# Altium PCB Analog.PcbDoc (part 1 of 2)
Units mil, origin at the board's own origin, x right, y up, seen from the top; angles counter-clockwise.
Board outline 2755 x 2460 mil, 4 copper layers (Top Layer, Power, Ground, Bottom Layer), stack 30.634 mil thick; 173 components, 144 nets, 556 pads, 140 vias.
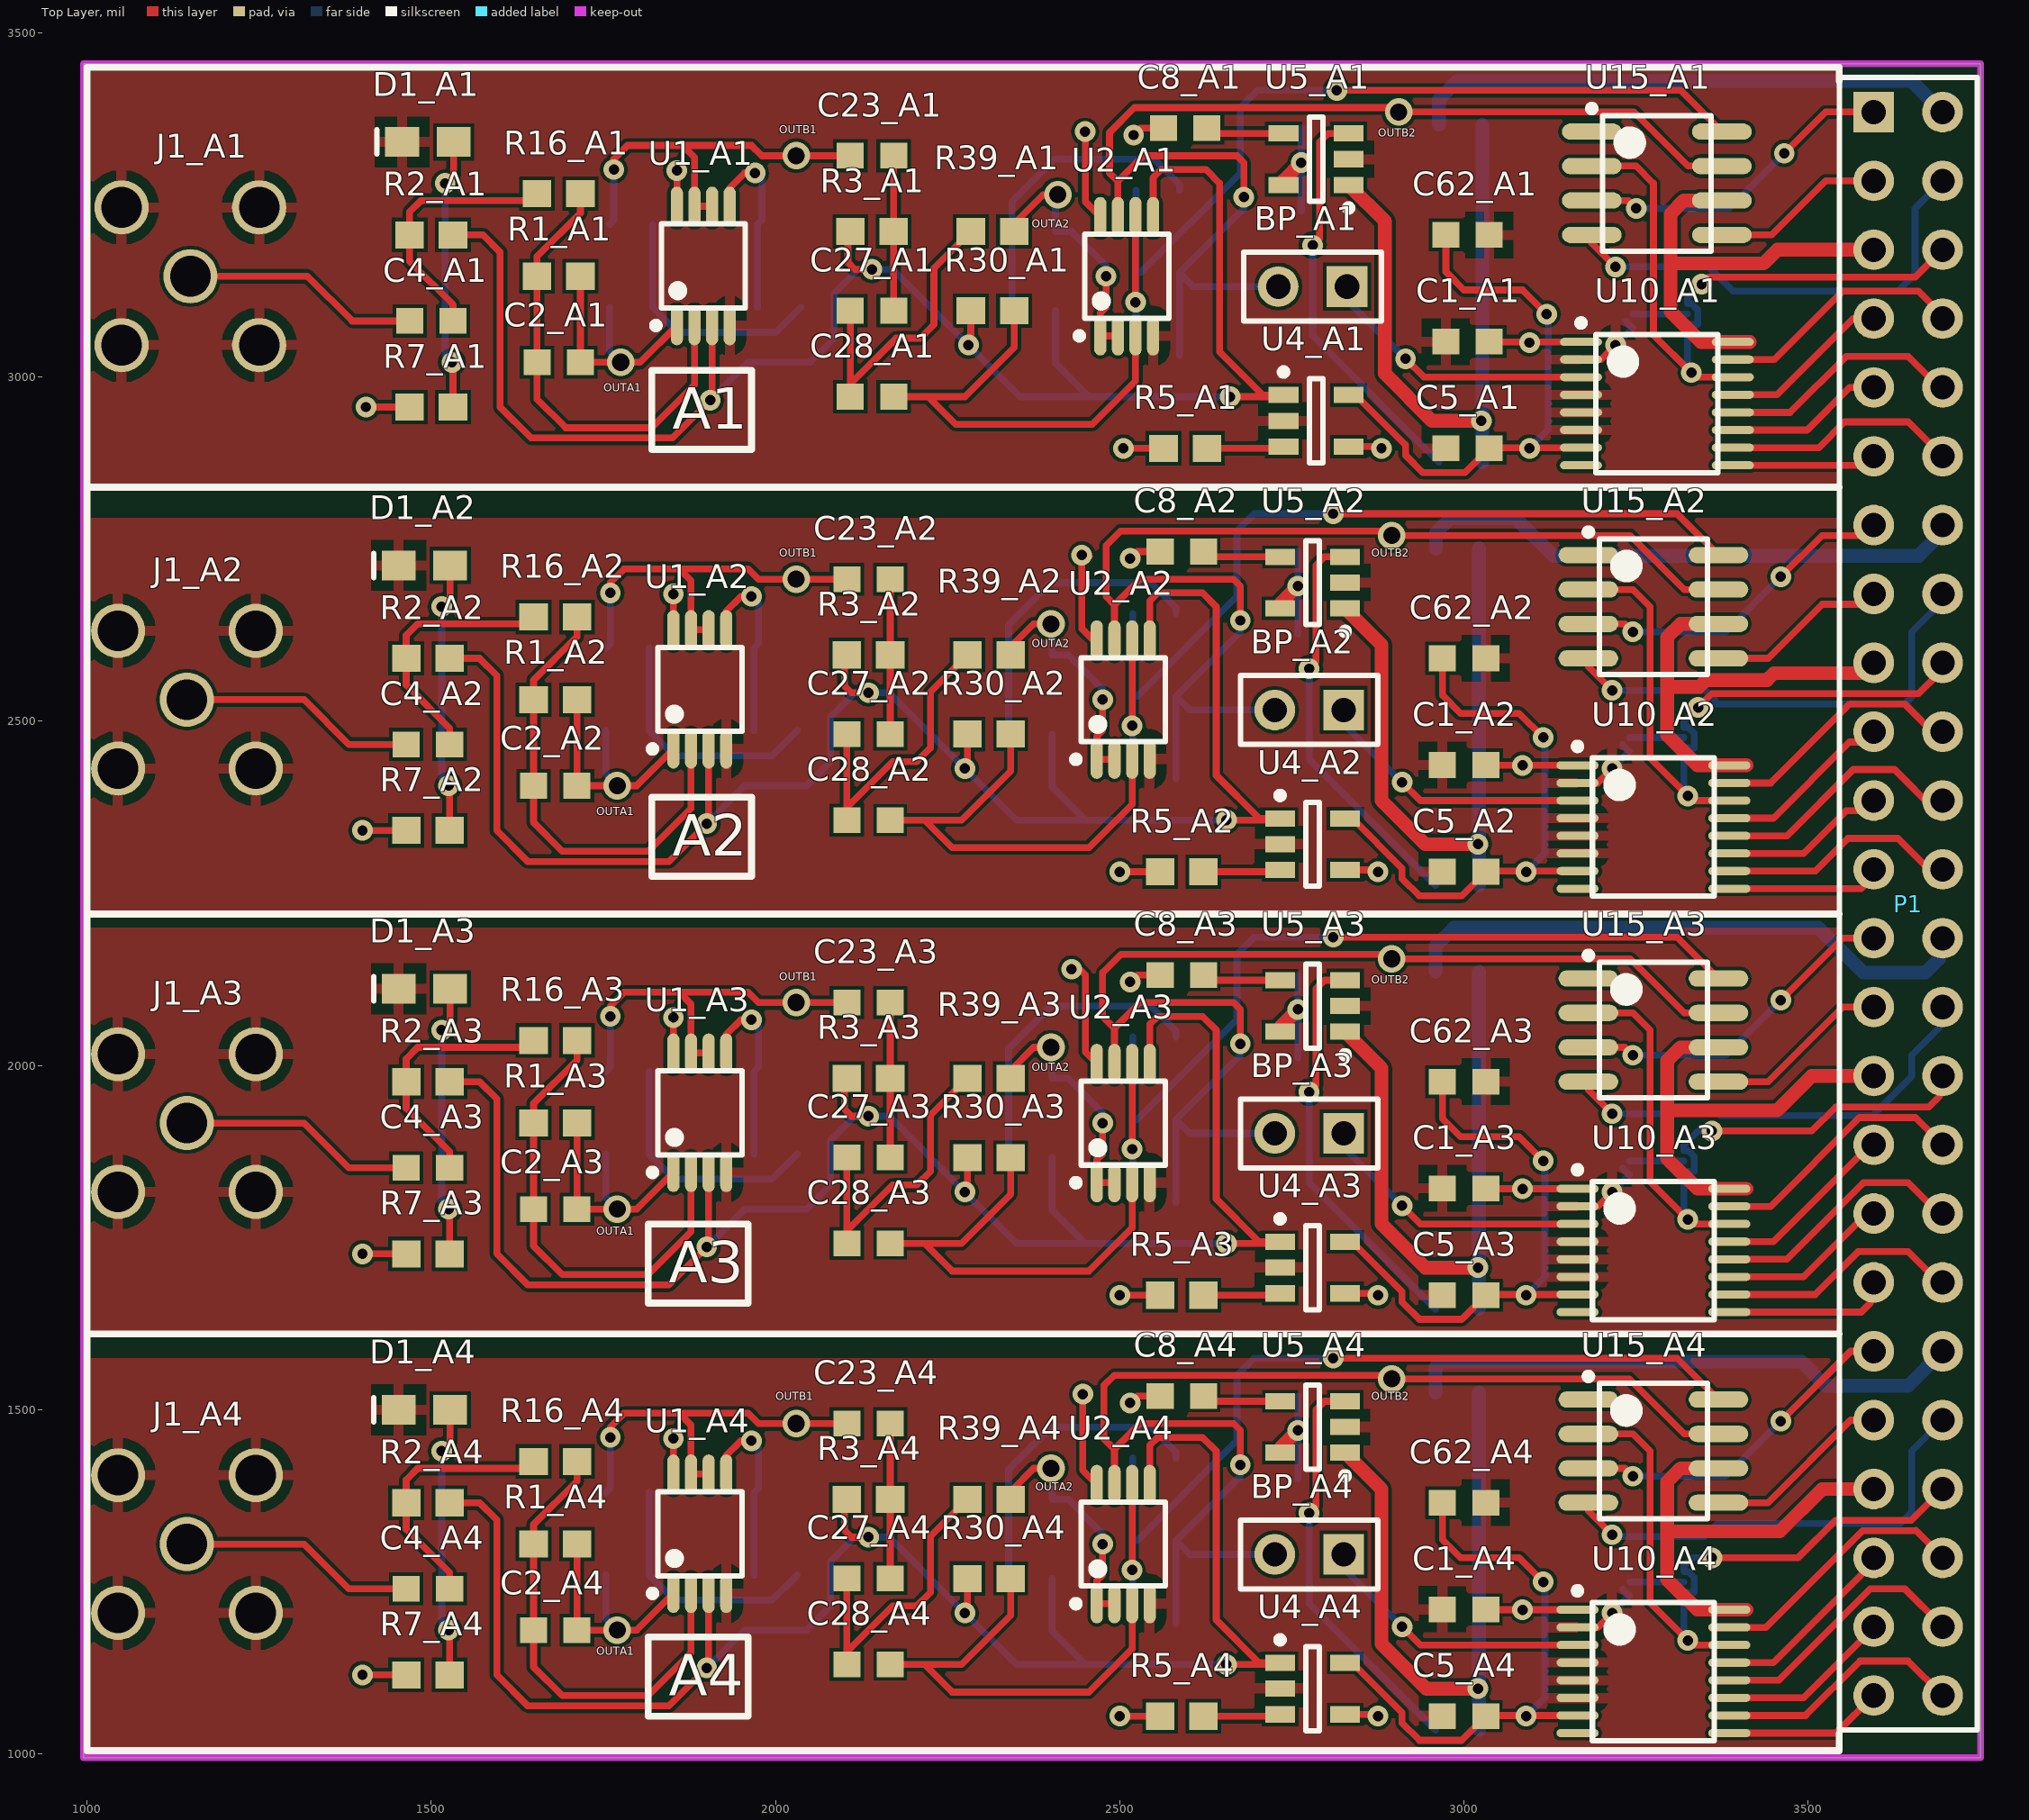
[diagram p0: Top Layer view]
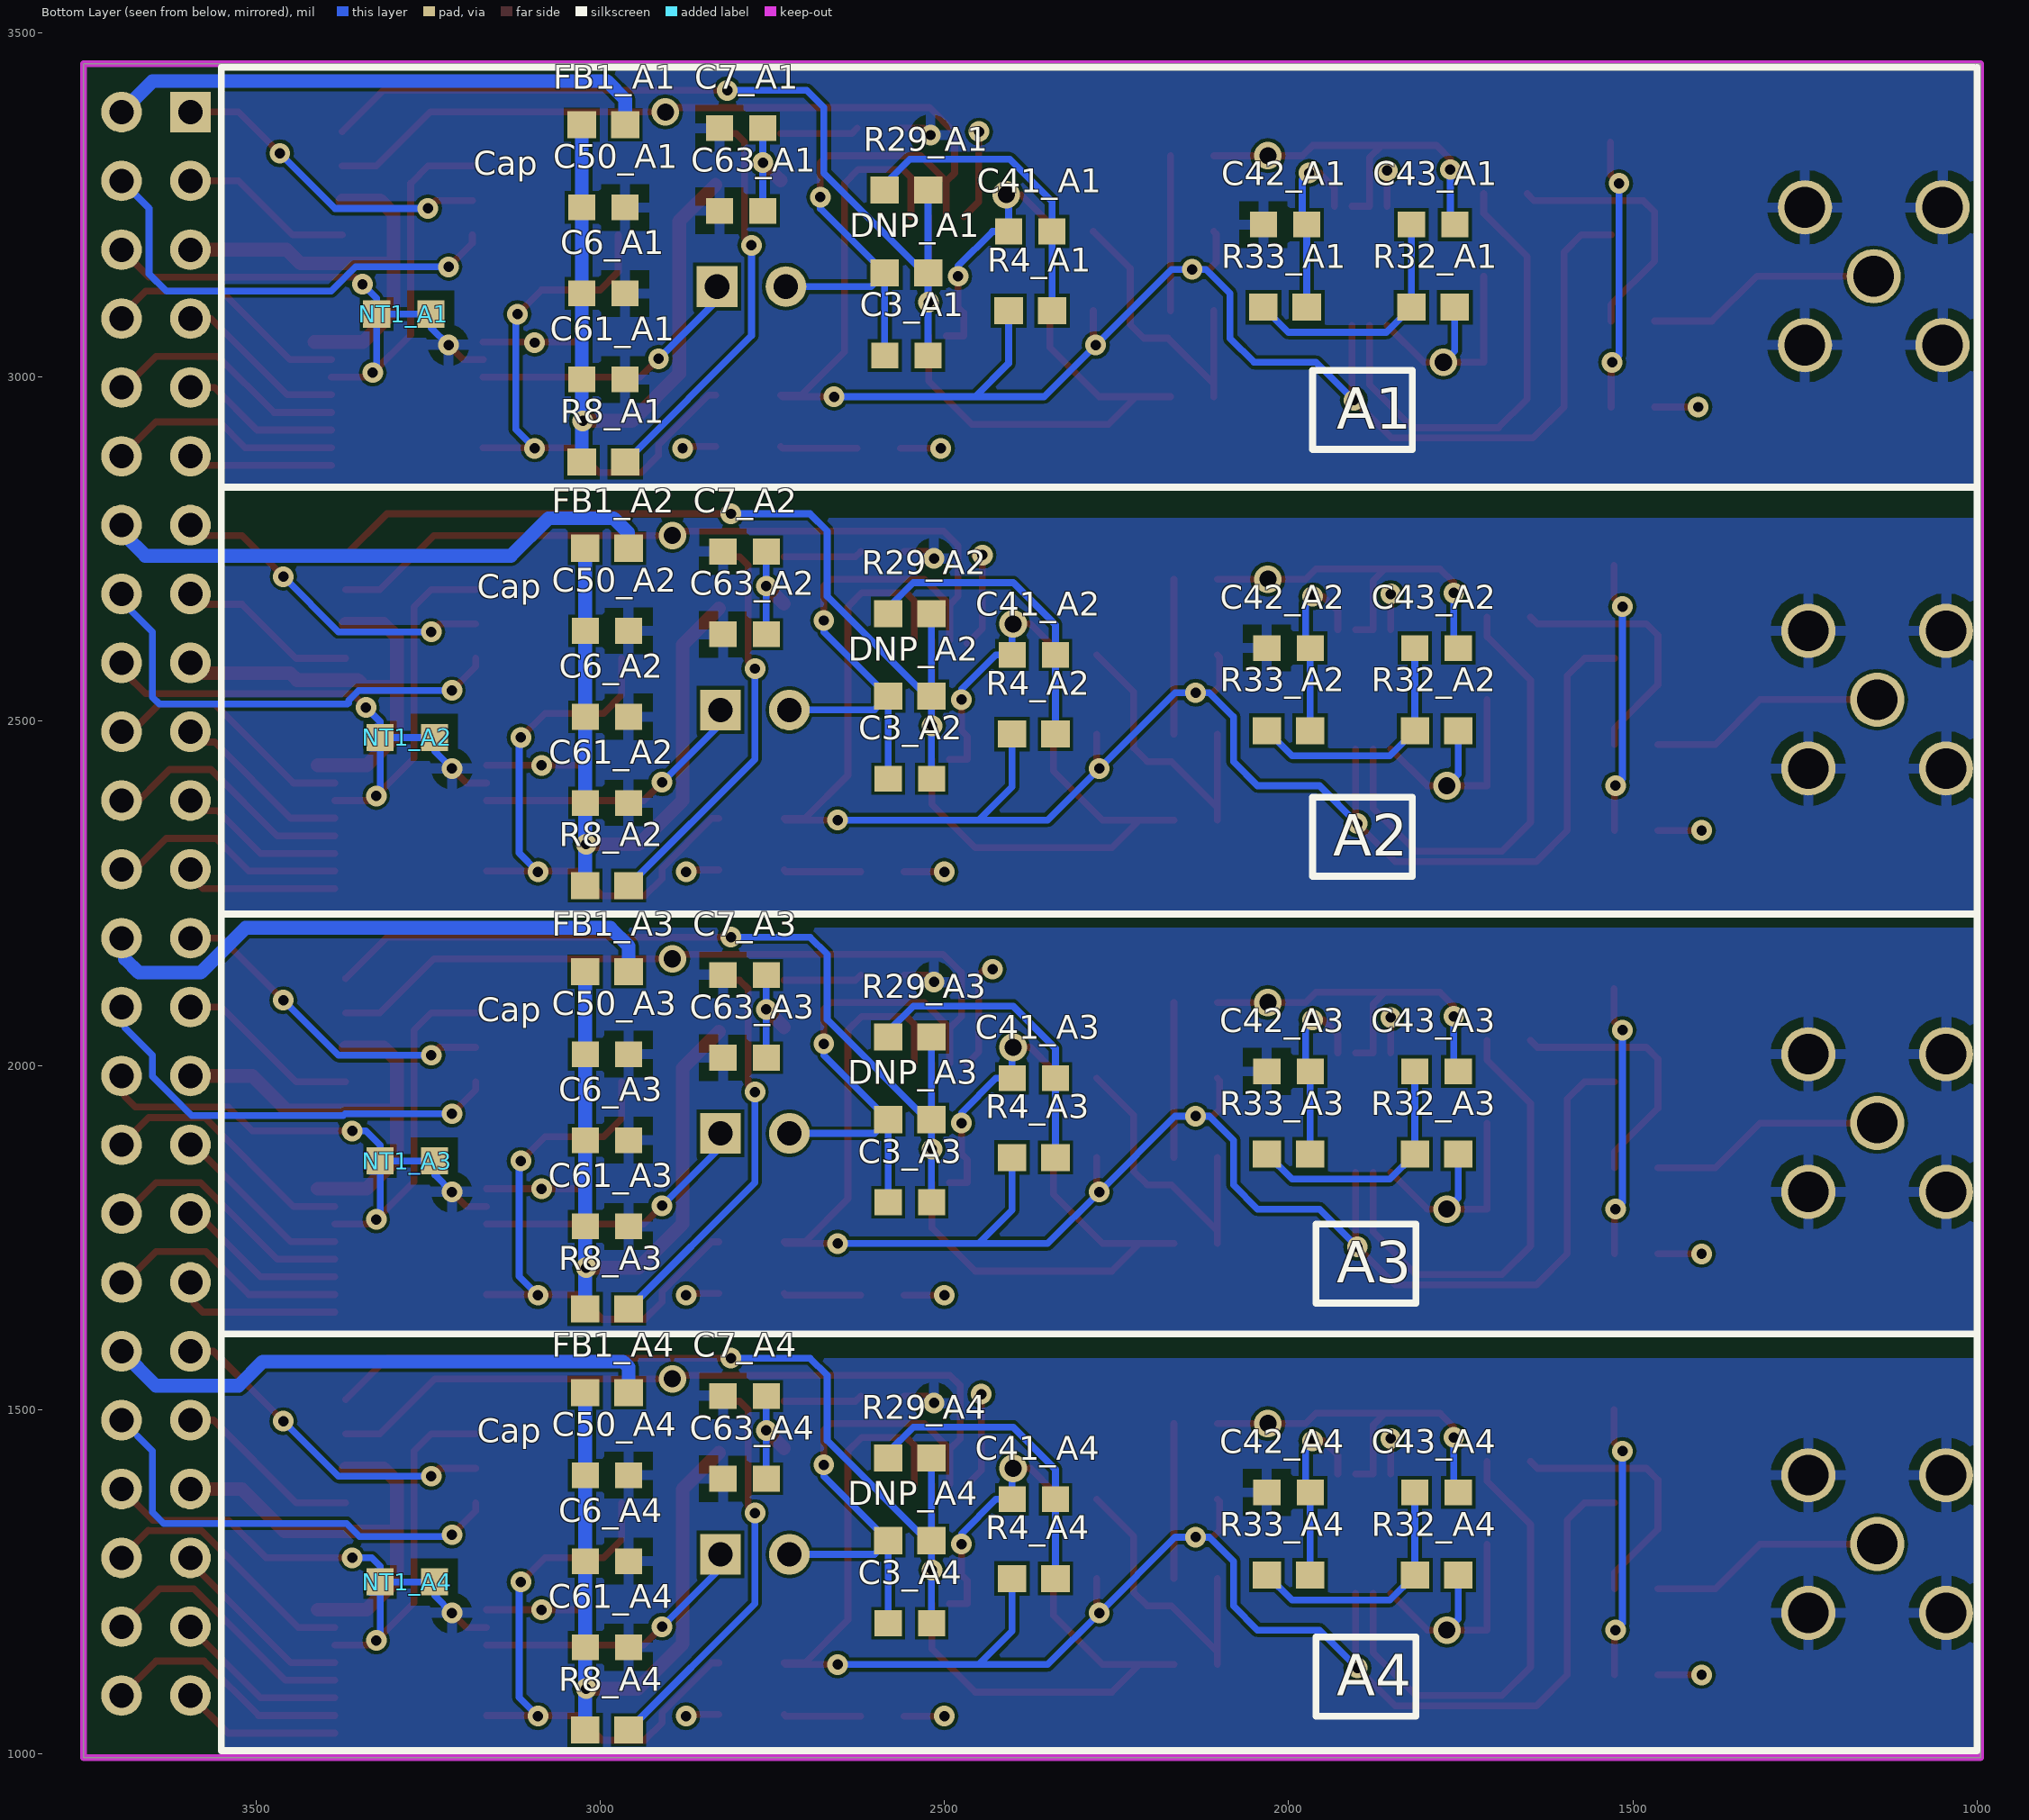
[diagram p1: Bottom Layer view, seen from below]
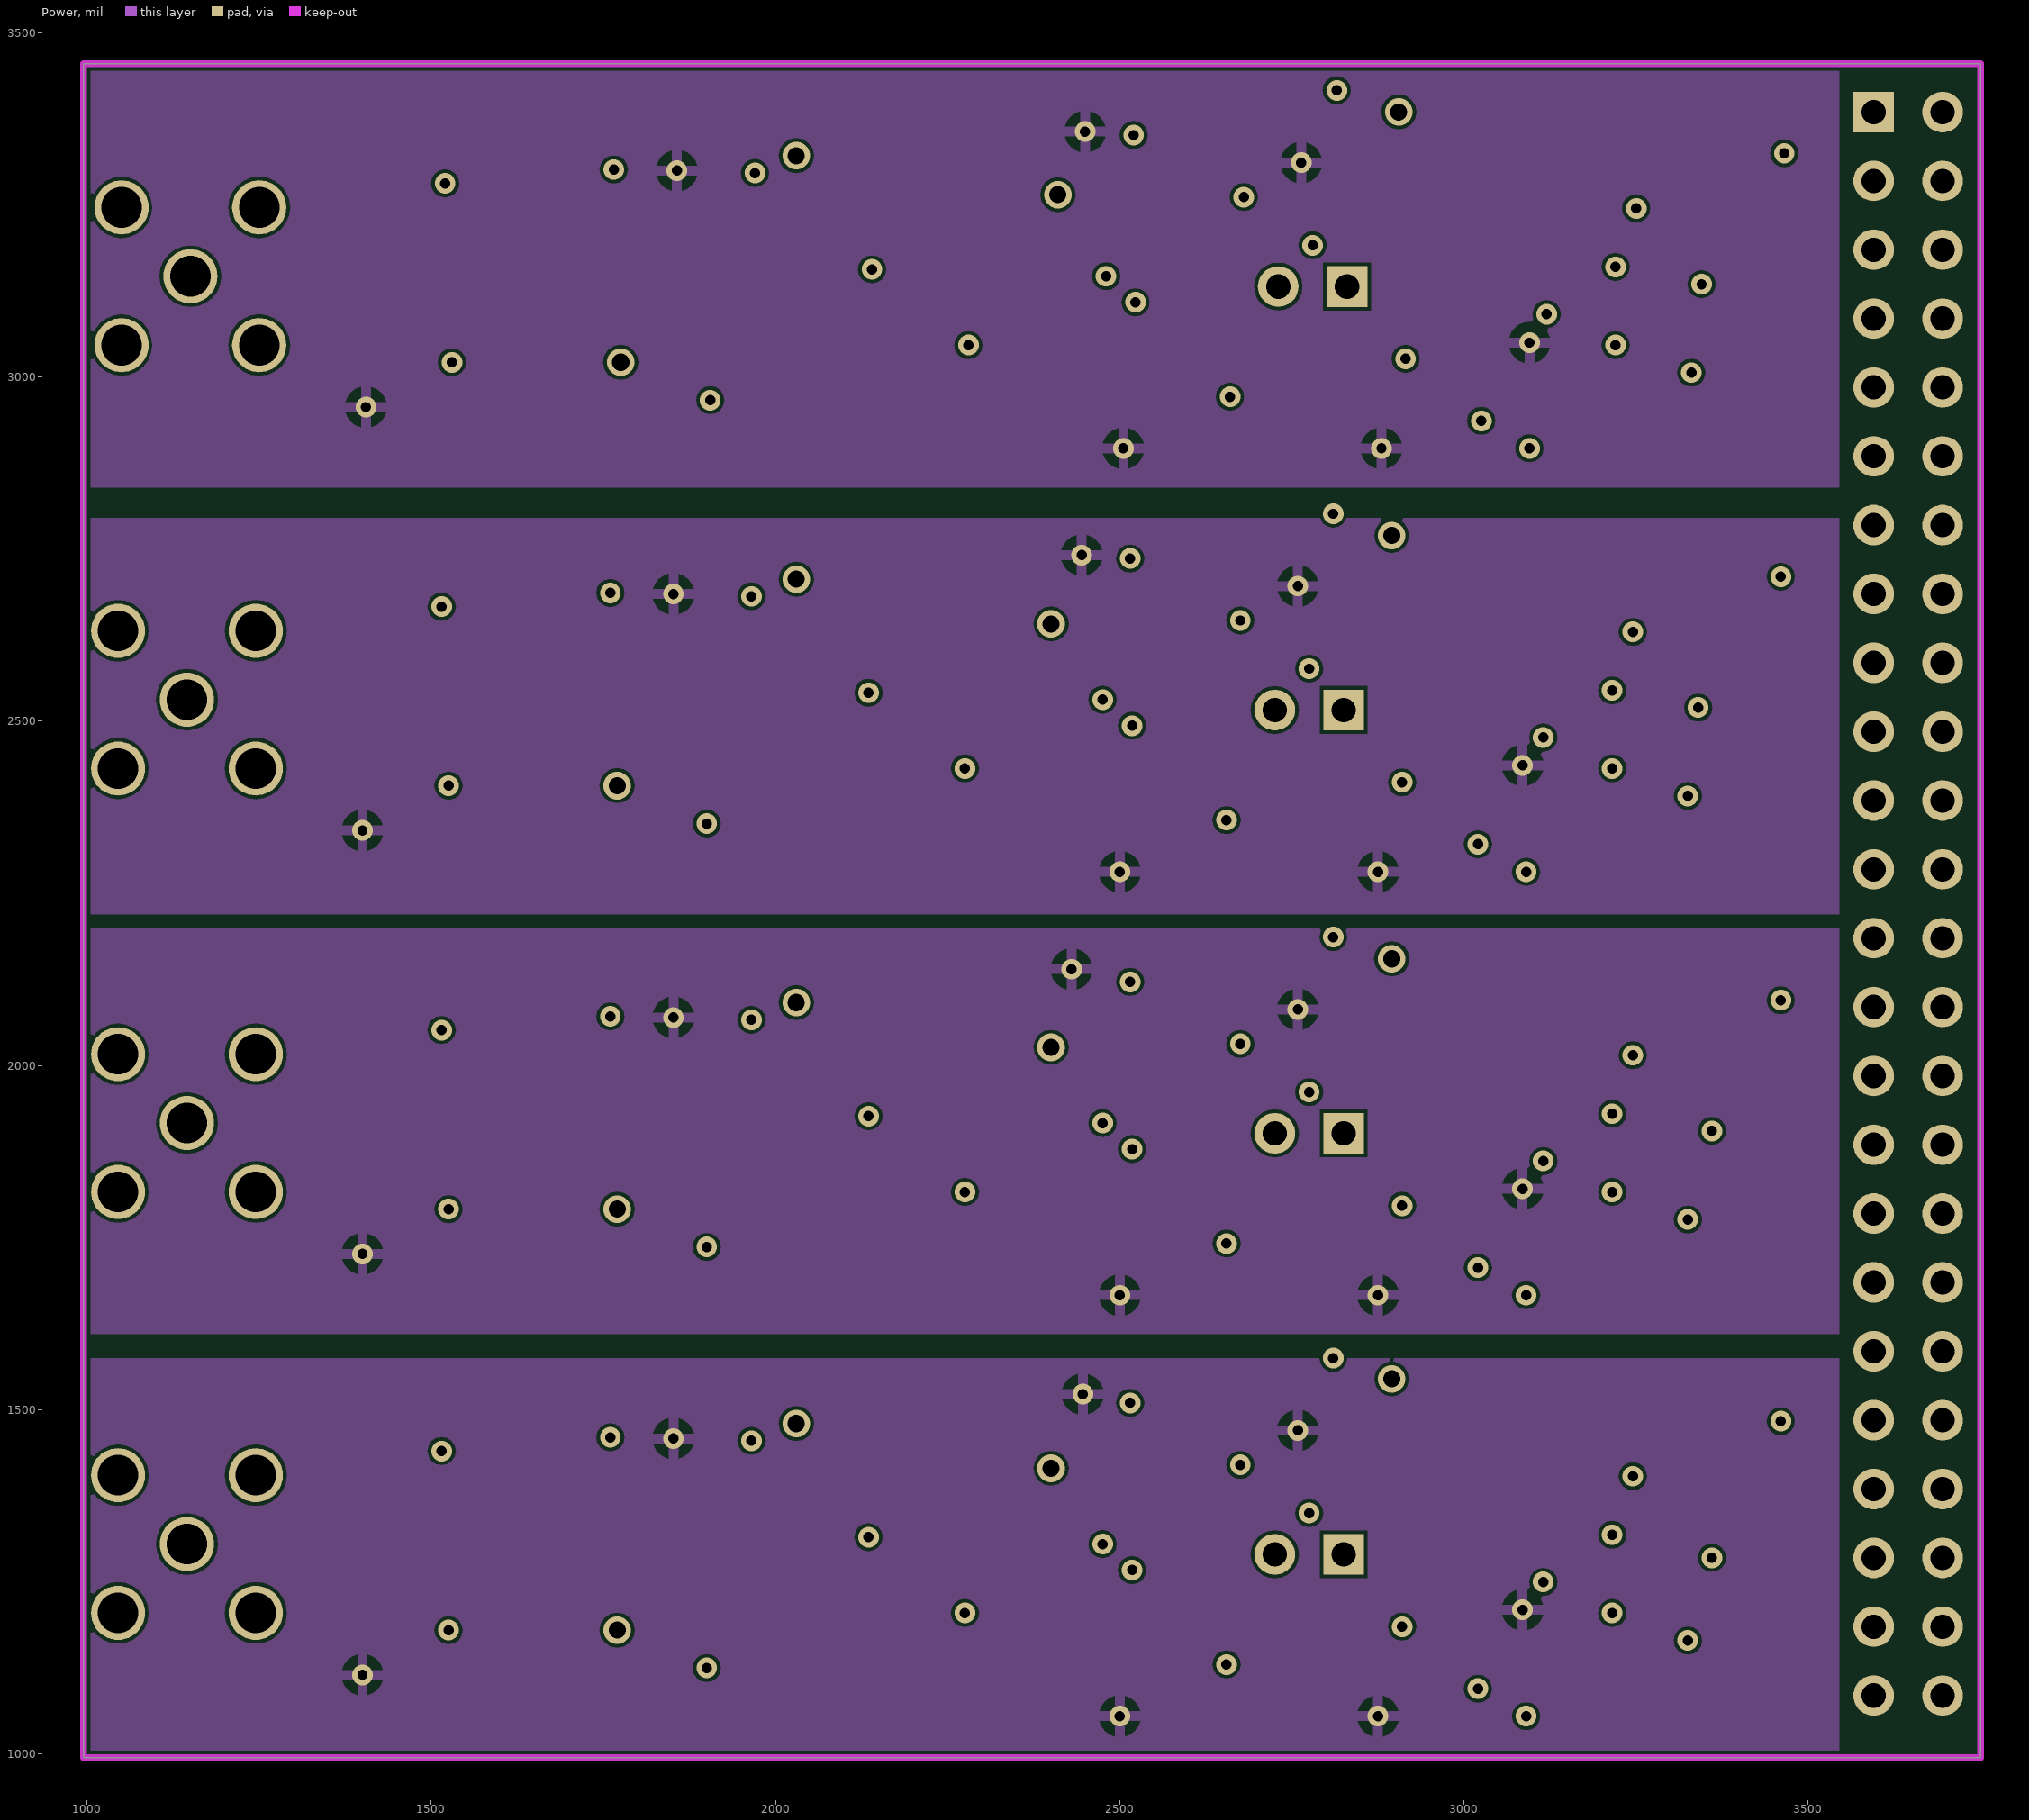
[diagram p2: Power]
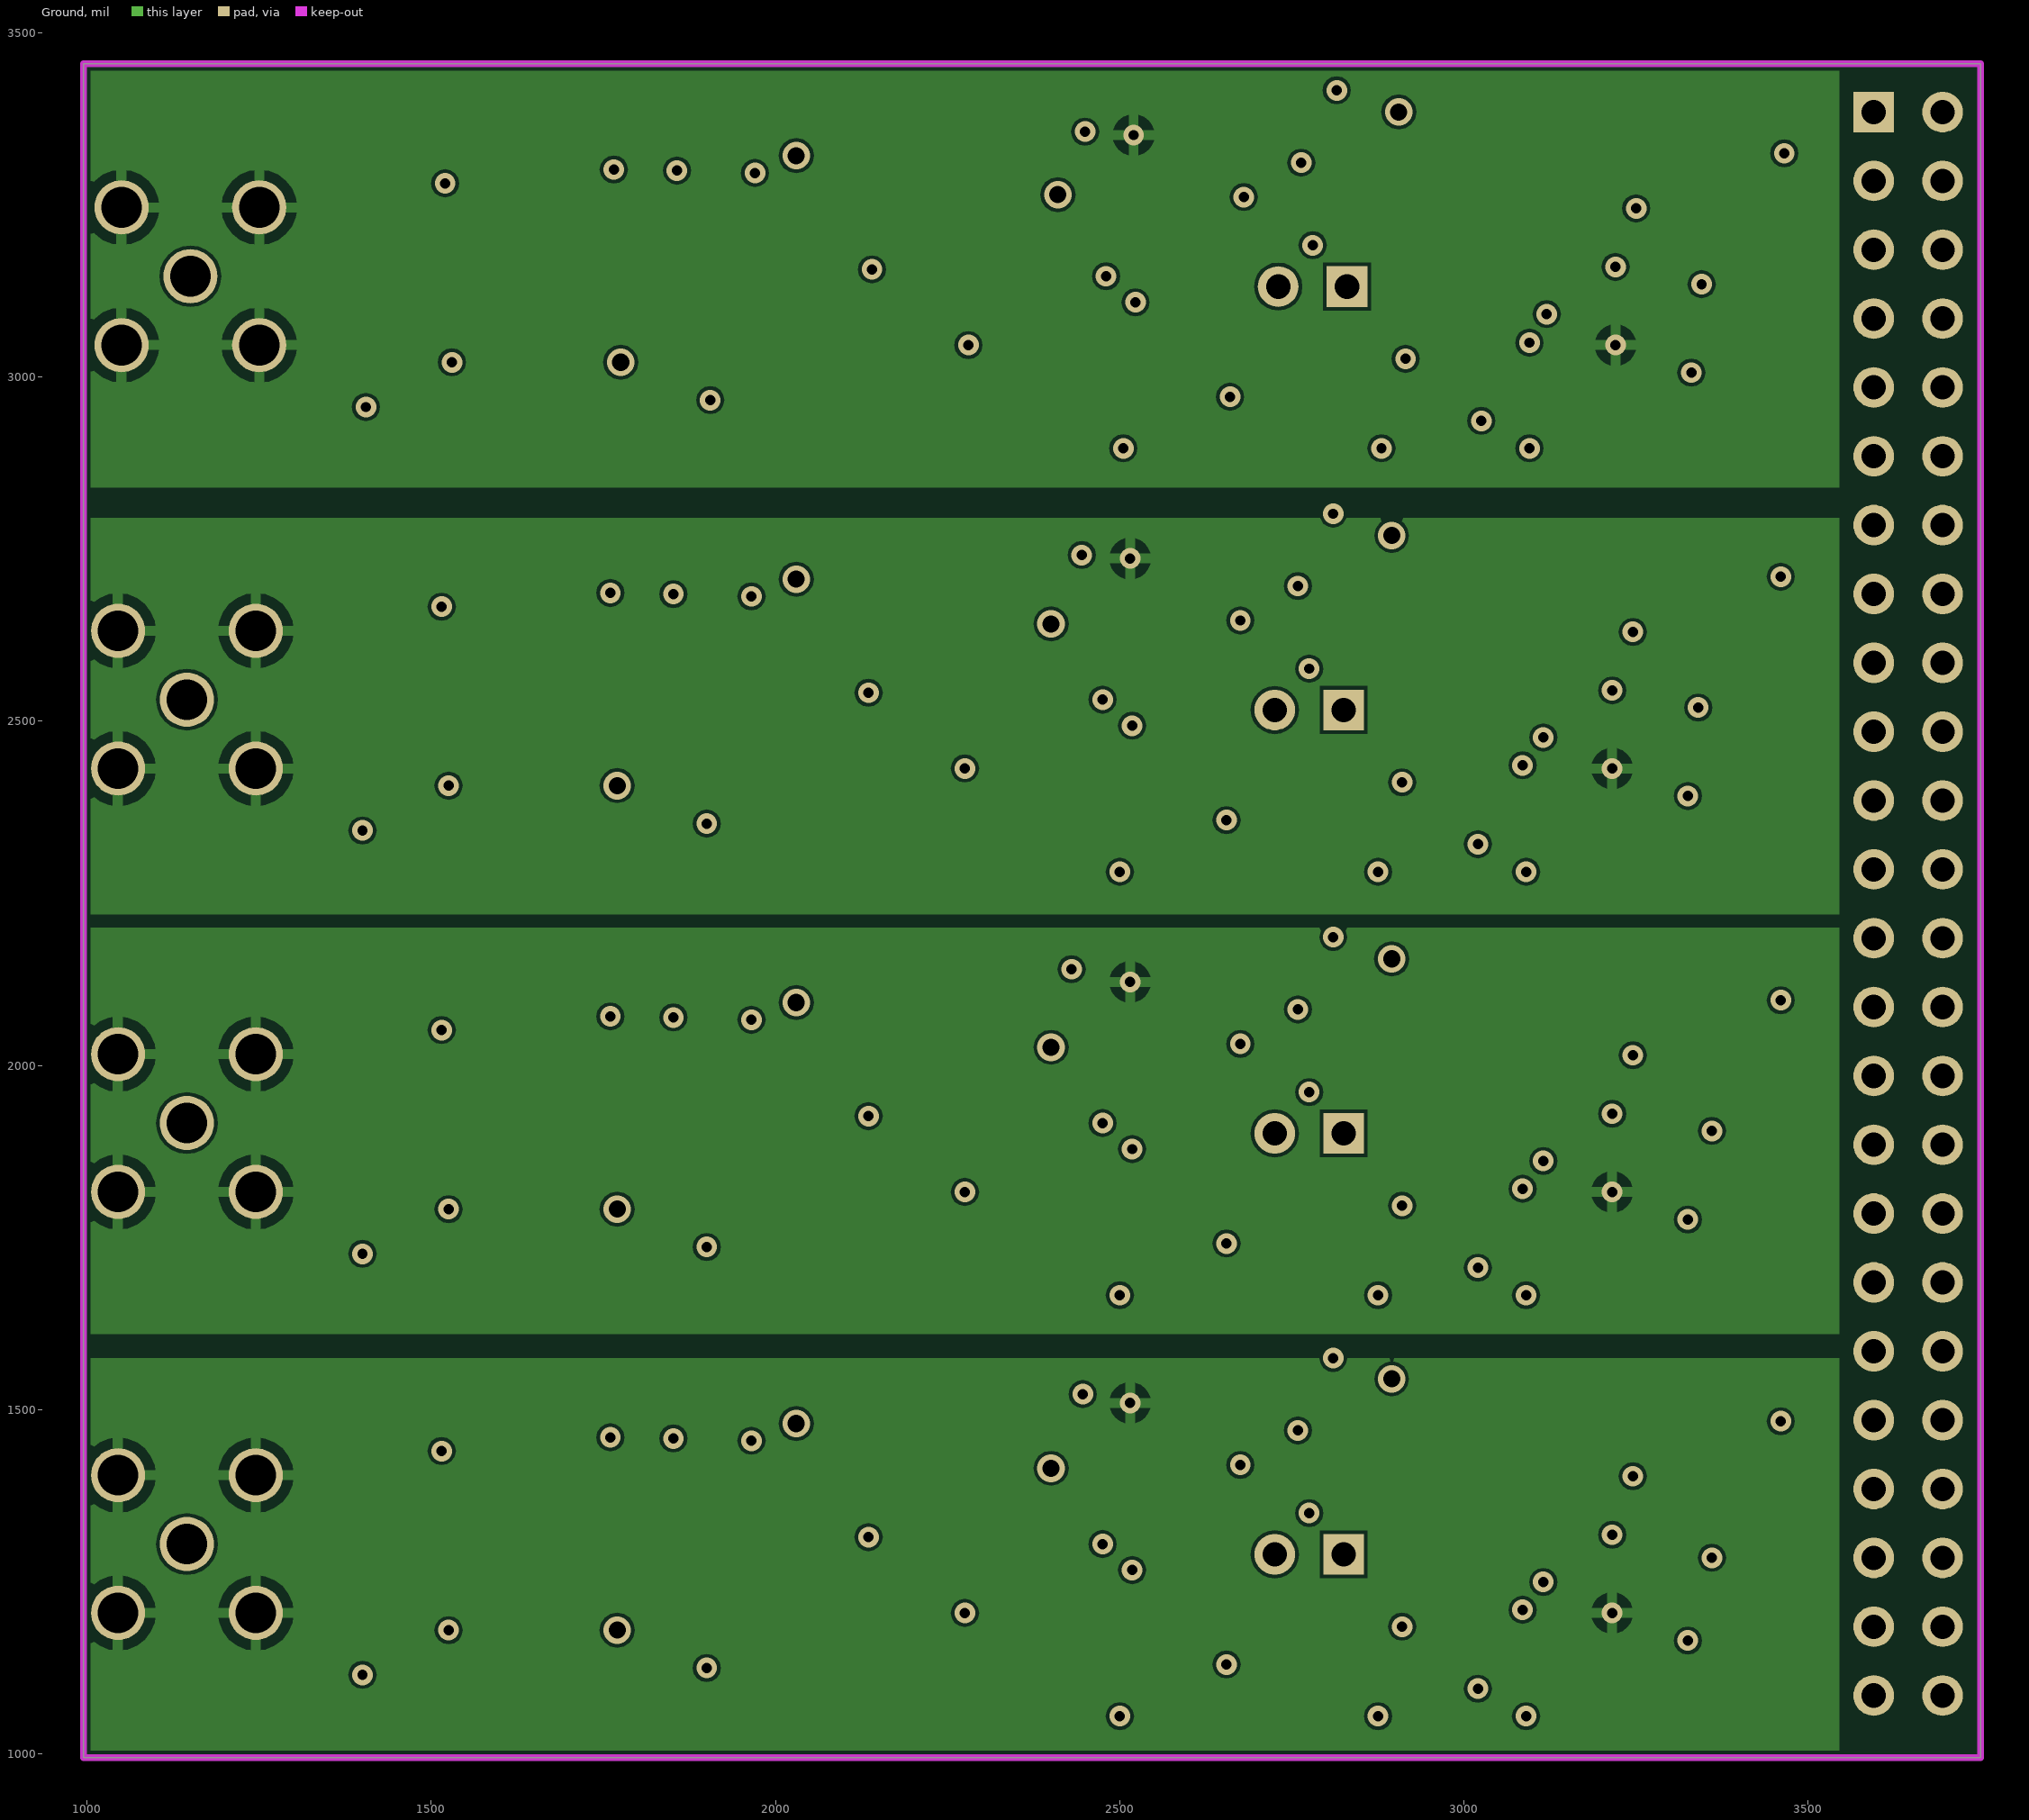
[diagram p3: Ground]

## Layer stack, top to bottom
Top Solder: solder mask 0.4, Solder Resist, Dk 3.5
Top Layer: signal copper 1.4
Dielectric 1: core 10, FR-4, Dk 4.2
Power: signal copper 1.417
Dielectric 3: prepreg 5, Dk 4.2
Ground: signal copper 1.417
Dielectric 2: core 10, Dk 4.2
Bottom Layer: signal copper 1.4
Bottom Solder: solder mask 0.4, Solder Resist, Dk 3.5

## Board outline
995,995 3750,995 3750,3455 995,3455

## Design rules (kind name [scope] priority, off if disabled: settings)
Clearance [All] p1: gap=5
PolygonConnect [All] p1: connectstyle=Relief reliefconductorwidth=15 reliefentries=4 polygonreliefangle="90 Angle" airgapwidth=15
RoomDefinition A4 [InComponentClass('A4')] p1: confinementstyle=ConfineIn formatcopy=TRUE lockcomponents=FALSE outline 1000,1000 3745,1000 3745,1610 1000,1610
RoomDefinition A3 [InComponentClass('A3')] p2: confinementstyle=ConfineIn formatcopy=TRUE lockcomponents=FALSE outline 1000,1611.5 3745,1611.5 3745,2221.5 1000,2221.5
RoomDefinition A2 [InComponentClass('A2')] p3: confinementstyle=ConfineIn formatcopy=TRUE lockcomponents=FALSE outline 1000,2226.5 3745,2226.5 3745,2836.5 1000,2836.5
RoomDefinition A1 [InComponentClass('A1')] p4: confinementstyle=ConfineIn formatcopy=TRUE lockcomponents=FALSE outline 1005,2841.5 3750,2841.5 3750,3451.5 1005,3451.5
RoutingVias [All] p1: holewidth=15 width=25 viastyle="Through Hole" minholewidth=15 minwidth=25 maxholewidth=25 maxwidth=40
SolderMaskExpansion [All] p1: expansion=4
Width [All] p1: maxlimit=20 minlimit=10 preferedwidth=10
30 further rules are at their usual default settings.

## Classes and differential pairs
net class DGND[1..4]: DGND1 DGND2 DGND3 DGND4
net class POT_CE[1..4]: POT_CE1 POT_CE2 POT_CE3 POT_CE4
net class EOC[1..4]: EOC1 EOC2 EOC3 EOC4
net class CONVST[1..4]: CONVST1 CONVST2 CONVST3 CONVST4
net class ADC_SCK[1..4]: ADC_SCK1 ADC_SCK2 ADC_SCK3 ADC_SCK4
component class Top_Level: P1
channel class Analog: A1 A2 A3 A4
net class APower: 4.2V_A1 4.2V_A2 4.2V_A3 4.2V_A4
net class AGround: AGND_A1 AGND_A2 AGND_A3 AGND_A4
component class A4: BP_A4 C1_A4 C2_A4 C3_A4 C4_A4 C5_A4 C6_A4 C7_A4 C8_A4 C23_A4 C27_A4 C28_A4 C41_A4 C42_A4 C43_A4 C50_A4 C61_A4 C62_A4 C63_A4 D1_A4 DNP_A4 FB1_A4 J1_A4 NT1_A4 R1_A4 R2_A4 R3_A4 R4_A4 R5_A4 R7_A4 R8_A4 R16_A4 R29_A4 R30_A4 R32_A4 R33_A4 R39_A4 U1_A4 U2_A4 U4_A4 U5_A4 U10_A4 U15_A4
component class A3: BP_A3 C1_A3 C2_A3 C3_A3 C4_A3 C5_A3 C6_A3 C7_A3 C8_A3 C23_A3 C27_A3 C28_A3 C41_A3 C42_A3 C43_A3 C50_A3 C61_A3 C62_A3 C63_A3 D1_A3 DNP_A3 FB1_A3 J1_A3 NT1_A3 R1_A3 R2_A3 R3_A3 R4_A3 R5_A3 R7_A3 R8_A3 R16_A3 R29_A3 R30_A3 R32_A3 R33_A3 R39_A3 U1_A3 U2_A3 U4_A3 U5_A3 U10_A3 U15_A3
component class A2: BP_A2 C1_A2 C2_A2 C3_A2 C4_A2 C5_A2 C6_A2 C7_A2 C8_A2 C23_A2 C27_A2 C28_A2 C41_A2 C42_A2 C43_A2 C50_A2 C61_A2 C62_A2 C63_A2 D1_A2 DNP_A2 FB1_A2 J1_A2 NT1_A2 R1_A2 R2_A2 R3_A2 R4_A2 R5_A2 R7_A2 R8_A2 R16_A2 R29_A2 R30_A2 R32_A2 R33_A2 R39_A2 U1_A2 U2_A2 U4_A2 U5_A2 U10_A2 U15_A2
component class A1: BP_A1 C1_A1 C2_A1 C3_A1 C4_A1 C5_A1 C6_A1 C7_A1 C8_A1 C23_A1 C27_A1 C28_A1 C41_A1 C42_A1 C43_A1 C50_A1 C61_A1 C62_A1 C63_A1 D1_A1 DNP_A1 FB1_A1 J1_A1 NT1_A1 R1_A1 R2_A1 R3_A1 R4_A1 R5_A1 R7_A1 R8_A1 R16_A1 R29_A1 R30_A1 R32_A1 R33_A1 R39_A1 U1_A1 U2_A1 U4_A1 U5_A1 U10_A1 U15_A1

## Components (designator, comment, footprint, x,y, rotation, side; value= is the part's Value field where it differs from the comment)
BP_A1 "Header 2" HDR1X2 2830,3131.5 r180 top (schematic designator BP)
BP_A2 "Header 2" HDR1X2 2825,2516.5 r180 top (schematic designator BP)
BP_A3 "Header 2" HDR1X2 2825,1901.5 r180 top (schematic designator BP)
BP_A4 "Header 2" HDR1X2 2825,1290 r180 top (schematic designator BP)
C1_A1 "Cap" CAPC0603 3005,3051.5 r0 top (schematic designator C1)
C1_A2 "Cap" CAPC0603 3000,2436.5 r0 top (schematic designator C1)
C1_A3 "Cap" CAPC0603 3000,1821.5 r0 top (schematic designator C1)
C1_A4 "Cap" CAPC0603 3000,1210 r0 top (schematic designator C1)
C2_A1 "Cap" CAPC0603 1685,3021.5 r0 top (schematic designator C2)
C2_A2 "Cap" CAPC0603 1680,2406.5 r0 top (schematic designator C2)
C2_A3 "Cap" CAPC0603 1680,1791.5 r0 top (schematic designator C2)
C2_A4 "Cap" CAPC0603 1680,1180 r0 top (schematic designator C2)
C3_A1 "Cap" CAPC0603 2555,3031.5 r0 bottom (schematic designator C3)
C3_A2 "Cap" CAPC0603 2550,2416.5 r0 bottom (schematic designator C3)
C3_A3 "Cap" CAPC0603 2550,1801.5 r0 bottom (schematic designator C3)
C3_A4 "Cap" CAPC0603 2550,1190 r0 bottom (schematic designator C3)
C4_A1 "Cap" CAPC0603 1500,3081.5 r0 top (schematic designator C4)
C4_A2 "Cap" CAPC0603 1495,2466.5 r0 top (schematic designator C4)
C4_A3 "Cap" CAPC0603 1495,1851.5 r0 top (schematic designator C4)
C4_A4 "Cap" CAPC0603 1495,1240 r0 top (schematic designator C4)
C5_A1 "Cap" CAPC0603 3005,2896.5 r0 top (schematic designator C5)
C5_A2 "Cap" CAPC0603 3000,2281.5 r0 top (schematic designator C5)
C5_A3 "Cap" CAPC0603 3000,1666.5 r0 top (schematic designator C5)
C5_A4 "Cap" CAPC0603 3000,1055 r0 top (schematic designator C5)
C6_A1 "Cap" CAPC0603 2995,3121.5 r0 bottom (schematic designator C6)
C6_A2 "Cap" CAPC0603 2990,2506.5 r0 bottom (schematic designator C6)
C6_A3 "Cap" CAPC0603 2990,1891.5 r0 bottom (schematic designator C6)
C6_A4 "Cap" CAPC0603 2990,1280 r0 bottom (schematic designator C6)
C7_A1 "Cap" CAPC0603 2795,3361.5 r180 bottom (schematic designator C7)
C7_A2 "Cap" CAPC0603 2790,2746.5 r180 bottom (schematic designator C7)
C7_A3 "Cap" CAPC0603 2790,2131.5 r180 bottom (schematic designator C7)
C7_A4 "Cap" CAPC0603 2790,1520 r180 bottom (schematic designator C7)
C8_A1 "Cap" CAPC0603 2595,3361.5 r0 top (schematic designator C8)
C8_A2 "Cap" CAPC0603 2590,2746.5 r0 top (schematic designator C8)
C8_A3 "Cap" CAPC0603 2590,2131.5 r0 top (schematic designator C8)
C8_A4 "Cap" CAPC0603 2590,1520 r0 top (schematic designator C8)
C23_A1 "Cap" CAPC0603 2140,3321.5 r0 top (schematic designator C23)
C23_A2 "Cap" CAPC0603 2135,2706.5 r0 top (schematic designator C23)
C23_A3 "Cap" CAPC0603 2135,2091.5 r0 top (schematic designator C23)
C23_A4 "Cap" CAPC0603 2135,1480 r0 top (schematic designator C23)
C27_A1 "Cap" CAPC0603 2140,3096.5 r180 top (schematic designator C27)
C27_A2 "Cap" CAPC0603 2135,2481.5 r180 top (schematic designator C27)
C27_A3 "Cap" CAPC0603 2135,1866.5 r180 top (schematic designator C27)
C27_A4 "Cap" CAPC0603 2135,1255 r180 top (schematic designator C27)
C28_A1 "Cap" CAPC0603 2140,2971.5 r0 top (schematic designator C28)
C28_A2 "Cap" CAPC0603 2135,2356.5 r0 top (schematic designator C28)
C28_A3 "Cap" CAPC0603 2135,1741.5 r0 top (schematic designator C28)
C28_A4 "Cap" CAPC0603 2135,1130 r0 top (schematic designator C28)
C41_A1 "Cap" CAPC0603 2375,3211.5 r180 bottom (schematic designator C41)
C41_A2 "Cap" CAPC0603 2370,2596.5 r180 bottom (schematic designator C41)
C41_A3 "Cap" CAPC0603 2370,1981.5 r180 bottom (schematic designator C41)
C41_A4 "Cap" CAPC0603 2370,1370 r180 bottom (schematic designator C41)
C42_A1 "Cap" CAPC0603 2005,3221.5 r180 bottom (schematic designator C42)
C42_A2 "Cap" CAPC0603 2000,2606.5 r180 bottom (schematic designator C42)
C42_A3 "Cap" CAPC0603 2000,1991.5 r180 bottom (schematic designator C42)
C42_A4 "Cap" CAPC0603 2000,1380 r180 bottom (schematic designator C42)
C43_A1 "Cap" CAPC0603 1790,3221.5 r0 bottom (schematic designator C43)
C43_A2 "Cap" CAPC0603 1785,2606.5 r0 bottom (schematic designator C43)
C43_A3 "Cap" CAPC0603 1785,1991.5 r0 bottom (schematic designator C43)
C43_A4 "Cap" CAPC0603 1785,1380 r0 bottom (schematic designator C43)
C50_A1 "Cap" CAPC0603 2995,3246.5 r180 bottom (schematic designator C50)
C50_A2 "Cap" CAPC0603 2990,2631.5 r180 bottom (schematic designator C50)
C50_A3 "Cap" CAPC0603 2990,2016.5 r180 bottom (schematic designator C50)
C50_A4 "Cap" CAPC0603 2990,1405 r180 bottom (schematic designator C50)
C61_A1 "Cap" CAPC0603 2995,2996.5 r180 bottom (schematic designator C61)
C61_A2 "Cap" CAPC0603 2990,2381.5 r180 bottom (schematic designator C61)
C61_A3 "Cap" CAPC0603 2990,1766.5 r180 bottom (schematic designator C61)
C61_A4 "Cap" CAPC0603 2990,1155 r180 bottom (schematic designator C61)
C62_A1 "Cap" CAPC0603 3005,3206.5 r0 top (schematic designator C62)
C62_A2 "Cap" CAPC0603 3000,2591.5 r0 top (schematic designator C62)
C62_A3 "Cap" CAPC0603 3000,1976.5 r0 top (schematic designator C62)
C62_A4 "Cap" CAPC0603 3000,1365 r0 top (schematic designator C62)
C63_A1 "Cap" CAPC0603 2795,3241.5 r0 bottom (schematic designator C63)
C63_A2 "Cap" CAPC0603 2790,2626.5 r0 bottom (schematic designator C63)
C63_A3 "Cap" CAPC0603 2790,2011.5 r0 bottom (schematic designator C63)
C63_A4 "Cap" CAPC0603 2790,1400 r0 bottom (schematic designator C63)
D1_A1 "LED-RED" LED0805-RED 1495,3341.5 r0 top (schematic designator D1)
D1_A2 "LED-RED" LED0805-RED 1490,2726.5 r0 top (schematic designator D1)
D1_A3 "LED-RED" LED0805-RED 1490,2111.5 r0 top (schematic designator D1)
D1_A4 "LED-RED" LED0805-RED 1490,1500 r0 top (schematic designator D1)
DNP_A1 "Res" RES0603 2555,3151.5 r0 bottom (schematic designator DNP)
DNP_A2 "Res" RES0603 2550,2536.5 r0 bottom (schematic designator DNP)
DNP_A3 "Res" RES0603 2550,1921.5 r0 bottom (schematic designator DNP)
DNP_A4 "Res" RES0603 2550,1310 r0 bottom (schematic designator DNP)
FB1_A1 "FBead" RES0603 2995,3366.5 r0 bottom (schematic designator FB1)
FB1_A2 "FBead" RES0603 2990,2751.5 r0 bottom (schematic designator FB1)
FB1_A3 "FBead" RES0603 2990,2136.5 r0 bottom (schematic designator FB1)
FB1_A4 "FBead" RES0603 2990,1525 r0 bottom (schematic designator FB1)
J1_A1 "MCX_FM" MCX_FEMALE 1150,3146.5 r0 top (schematic designator J1)
J1_A2 "MCX_FM" MCX_FEMALE 1145,2531.5 r0 top (schematic designator J1)
J1_A3 "MCX_FM" MCX_FEMALE 1145,1916.5 r0 top (schematic designator J1)
J1_A4 "MCX_FM" MCX_FEMALE 1145,1305 r0 top (schematic designator J1)
NT1_A1 "NetTie" NT_5mil 3285,3091.5 r0 bottom net-tie (schematic designator NT1)
NT1_A2 "NetTie" NT_5mil 3280,2476.5 r0 bottom net-tie (schematic designator NT1)
NT1_A3 "NetTie" NT_5mil 3280,1861.5 r0 bottom net-tie (schematic designator NT1)
NT1_A4 "NetTie" NT_5mil 3280,1250 r0 bottom net-tie (schematic designator NT1)
P1 "Header 24X2" HDR2X24 3595,3385 r270 top
R1_A1 "Res" RES0603 1685,3146.5 r0 top (schematic designator R1)
R1_A2 "Res" RES0603 1680,2531.5 r0 top (schematic designator R1)
R1_A3 "Res" RES0603 1680,1916.5 r0 top (schematic designator R1)
R1_A4 "Res" RES0603 1680,1305 r0 top (schematic designator R1)
R2_A1 "Res" RES0603 1500,3206.5 r180 top (schematic designator R2)
R2_A2 "Res" RES0603 1495,2591.5 r180 top (schematic designator R2)
R2_A3 "Res" RES0603 1495,1976.5 r180 top (schematic designator R2)
R2_A4 "Res" RES0603 1495,1365 r180 top (schematic designator R2)
R3_A1 "Res" RES0603 2140,3211.5 r0 top (schematic designator R3)
R3_A2 "Res" RES0603 2135,2596.5 r0 top (schematic designator R3)
R3_A3 "Res" RES0603 2135,1981.5 r0 top (schematic designator R3)
R3_A4 "Res" RES0603 2135,1370 r0 top (schematic designator R3)
R4_A1 "Res" RES0603 2375,3096.5 r180 bottom (schematic designator R4)
R4_A2 "Res" RES0603 2370,2481.5 r180 bottom (schematic designator R4)
R4_A3 "Res" RES0603 2370,1866.5 r180 bottom (schematic designator R4)
R4_A4 "Res" RES0603 2370,1255 r180 bottom (schematic designator R4)
R5_A1 "Res" RES0603 2595,2896.5 r180 top (schematic designator R5)
R5_A2 "Res" RES0603 2590,2281.5 r180 top (schematic designator R5)
R5_A3 "Res" RES0603 2590,1666.5 r180 top (schematic designator R5)
R5_A4 "Res" RES0603 2590,1055 r180 top (schematic designator R5)
R7_A1 "Res" RES0603 1500,2956.5 r0 top (schematic designator R7)
R7_A2 "Res" RES0603 1495,2341.5 r0 top (schematic designator R7)
R7_A3 "Res" RES0603 1495,1726.5 r0 top (schematic designator R7)
R7_A4 "Res" RES0603 1495,1115 r0 top (schematic designator R7)
R8_A1 "Res" RES0603 2995,2876.5 r0 bottom (schematic designator R8)
R8_A2 "Res" RES0603 2990,2261.5 r0 bottom (schematic designator R8)
R8_A3 "Res" RES0603 2990,1646.5 r0 bottom (schematic designator R8)
R8_A4 "Res" RES0603 2990,1035 r0 bottom (schematic designator R8)
R16_A1 "Res" RES0603 1685,3266.5 r0 top (schematic designator R16)
R16_A2 "Res" RES0603 1680,2651.5 r0 top (schematic designator R16)
R16_A3 "Res" RES0603 1680,2036.5 r0 top (schematic designator R16)
R16_A4 "Res" RES0603 1680,1425 r0 top (schematic designator R16)
R29_A1 "Res" RES0603 2555,3271.5 r180 bottom (schematic designator R29)
R29_A2 "Res" RES0603 2550,2656.5 r180 bottom (schematic designator R29)
R29_A3 "Res" RES0603 2550,2041.5 r180 bottom (schematic designator R29)
R29_A4 "Res" RES0603 2550,1430 r180 bottom (schematic designator R29)
R30_A1 "Res" RES0603 2315,3096.5 r0 top (schematic designator R30)
R30_A2 "Res" RES0603 2310,2481.5 r0 top (schematic designator R30)
R30_A3 "Res" RES0603 2310,1866.5 r0 top (schematic designator R30)
R30_A4 "Res" RES0603 2310,1255 r0 top (schematic designator R30)
R32_A1 "Res" RES0603 1790,3101.5 r0 bottom (schematic designator R32)
R32_A2 "Res" RES0603 1785,2486.5 r0 bottom (schematic designator R32)
R32_A3 "Res" RES0603 1785,1871.5 r0 bottom (schematic designator R32)
R32_A4 "Res" RES0603 1785,1260 r0 bottom (schematic designator R32)
R33_A1 "Res" RES0603 2005,3101.5 r180 bottom (schematic designator R33)
R33_A2 "Res" RES0603 2000,2486.5 r180 bottom (schematic designator R33)
R33_A3 "Res" RES0603 2000,1871.5 r180 bottom (schematic designator R33)
R33_A4 "Res" RES0603 2000,1260 r180 bottom (schematic designator R33)
R39_A1 "Res" RES0603 2315,3211.5 r0 top (schematic designator R39)
R39_A2 "Res" RES0603 2310,2596.5 r0 top (schematic designator R39)
R39_A3 "Res" RES0603 2310,1981.5 r0 top (schematic designator R39)
R39_A4 "Res" RES0603 2310,1370 r0 top (schematic designator R39)
U1_A1 "LMV797" TSSOP-8N 1895,3161.5 r90 top (schematic designator U1)
U1_A2 "LMV797" TSSOP-8N 1890,2546.5 r90 top (schematic designator U1)
U1_A3 "LMV797" TSSOP-8N 1890,1931.5 r90 top (schematic designator U1)
U1_A4 "LMV797" TSSOP-8N 1890,1320 r90 top (schematic designator U1)
U2_A1 "LMV797" TSSOP-8N 2510,3146.5 r90 top (schematic designator U2)
U2_A2 "LMV797" TSSOP-8N 2505,2531.5 r90 top (schematic designator U2)
U2_A3 "LMV797" TSSOP-8N 2505,1916.5 r90 top (schematic designator U2)
U2_A4 "LMV797" TSSOP-8N 2505,1305 r90 top (schematic designator U2)
U4_A1 "REF2041" SOT23-5 2785,2936.5 r0 top (schematic designator U4)
U4_A2 "REF2041" SOT23-5 2780,2321.5 r0 top (schematic designator U4)
U4_A3 "REF2041" SOT23-5 2780,1706.5 r0 top (schematic designator U4)
U4_A4 "REF2041" SOT23-5 2780,1095 r0 top (schematic designator U4)
U5_A1 "LDO 4.2V" sot23-5 2785,3316.5 r180 top (schematic designator U5)
U5_A2 "LDO 4.2V" sot23-5 2780,2701.5 r180 top (schematic designator U5)
U5_A3 "LDO 4.2V" sot23-5 2780,2086.5 r180 top (schematic designator U5)
U5_A4 "LDO 4.2V" sot23-5 2780,1475 r180 top (schematic designator U5)
U10_A1 "ADC 16bit 500k" TSSOP-16pin 3280,2961.5 r0 top (schematic designator U10)
U10_A2 "ADC 16bit 500k" TSSOP-16pin 3275,2346.5 r0 top (schematic designator U10)
U10_A3 "ADC 16bit 500k" TSSOP-16pin 3275,1731.5 r0 top (schematic designator U10)
U10_A4 "ADC 16bit 500k" TSSOP-16pin 3275,1120 r0 top (schematic designator U10)
U15_A1 "AD8400" SOIC-8PIN 3280,3281.5 r0 top (schematic designator U15)
U15_A2 "AD8400" SOIC-8PIN 3275,2666.5 r0 top (schematic designator U15)
U15_A3 "AD8400" SOIC-8PIN 3275,2051.5 r0 top (schematic designator U15)
U15_A4 "AD8400" SOIC-8PIN 3275,1440 r0 top (schematic designator U15)

## Footprints (in the part's own frame and the unit in brackets; to place one, negate y for a bottom-side part, rotate by r counter-clockwise, add the part's x,y. Pads: shape width x height; smd on the part's side, far side on the other; paste and mask are expansions set on the pad)
CAPC0603 [mm] "Chip Capacitor, 2-Leads, Body 1.60x0.80mm, IPC Medium Density"
  rect 1x0.95 smd: 1(-0.8,0) 2(0.8,0)
  body extent -0.88,-0.48 0.87,0.48, height 0.8
HDR1X2 [mm] "Connector; Header; 2 Position"
  rect 1.5x1.5 hole 0.9: 1(0,0)
  round 1.5 hole 0.9: 2(2.54,0)
  silkscreen extent -1.27,-1.27 3.81,1.27
HDR2X24 [mm] "Connector; Header; 24x2 Position"
  rect 1.5x1.5 hole 0.9: 1(0,0)
  round 1.5 hole 0.9: 2(0,2.54) 3(2.54,0) 4(2.54,2.54) 5(5.08,0) 6(5.08,2.54) 7(7.62,0) 8(7.62,2.54) 9(10.16,0) 10(10.16,2.54) 11(12.7,0) 12(12.7,2.54) 13(15.24,0) 14(15.24,2.54) 15(17.78,0) 16(17.78,2.54) 17(20.32,0) 18(20.32,2.54) 19(22.86,0) 20(22.86,2.54) 21(25.4,0) 22(25.4,2.54) 23(27.94,0) 24(27.94,2.54) 25(30.48,0) 26(30.48,2.54) 27(33.02,0) 28(33.02,2.54) 29(35.56,0) 30(35.56,2.54) 31(38.1,0) 32(38.1,2.54) 33(40.64,0) 34(40.64,2.54) 35(43.18,0) 36(43.18,2.54) 37(45.72,0) 38(45.72,2.54) 39(48.26,0) 40(48.26,2.54) 41(50.8,0) 42(50.8,2.54) 43(53.34,0) 44(53.34,2.54) 45(55.88,0) 46(55.88,2.54) 47(58.42,0) 48(58.42,2.54)
  silkscreen extent -1.27,-1.27 59.69,3.81
LED0805-RED [mm] "Molded Diode, 2-Leads, Body 2.0x1.3mm, IPC Medium Density"
  rect 1.25x1.1 smd: 1(-0.95,0) 2(0.95,0)
  silkscreen extent -1.87,-0.45 -1.87,0.45, body extent -1.01,-0.62 1.01,0.63, height 1.1
MCX_FEMALE [mm] "MCX_female CONN JACK RCPT R/A"
  round 2 hole 1.5: 1(0,0) 2(-2.54,-2.54) 2(-2.54,2.54) 2(2.54,-2.54) 2(2.54,2.54)
  body extent -2.95,-3.07 6.55,2.93, height 5.9
NT_5mil [mm] "Thin Net Tie"
  rect 1x1 smd paste+0 mask+0: 1(-1,0) 2(1,0)
  Top Layer lines w0.254: -1,0 1,0
RES0603 [mm] "Chip Resistor, 2-Leads, Body 1.60x0.80mm, IPC Medium Density"
  rect 1.05x1 smd: 1(-0.8,0) 2(0.8,0)
  body extent -0.88,-0.48 0.87,0.47, height 0.8
SOIC-8PIN [mm] "For 296-1345-1-ND"
  oval 2.2x0.6 smd: 1(-2.4,1.905) 2(-2.4,0.635) 3(-2.4,-0.635) 4(-2.4,-1.905) 5(2.4,-1.905) 6(2.4,-0.635) 7(2.4,0.635) 8(2.4,1.905)
  silkscreen extent -2.52,-2.5 2,2.88, body extent -2,-2.5 2,2.5, height 1.75
SOT23-5 [mm] "Used for LP2992"
  rect 1.1x0.6 smd: 1(-1.2,0.95) 2(-1.2,0) 3(-1.2,-0.95) 4(1.2,-0.95) 5(1.2,0.95)
  silkscreen extent -1.32,-1.55 0.25,1.92, body extent -0.87,-1.52 0.87,1.53, height 0.25
sot23-5 [mm] "Used for LP2992"
  rect 1.1x0.6 smd: 1(-1.2,0.95) 2(-1.2,0) 3(-1.2,-0.95) 4(1.2,-0.95) 5(1.2,0.95)
  silkscreen extent -1.33,-1.55 0.25,1.92, body extent -0.87,-1.52 0.87,1.53, height 0.25
TSSOP-8N [mm]
  oval 1.45x0.45 smd: 1(-2.2,0.975) 2(-2.2,0.325) 3(-2.2,-0.325) 4(-2.2,-0.975) 5(2.2,-0.975) 6(2.2,-0.325) 7(2.2,0.325) 8(2.2,0.975)
  silkscreen extent -2.32,-1.55 1.55,1.87, body extent -1.55,-1.55 1.55,1.55, height 1.1
TSSOP-16pin [mm] "For 296-19764-ND"
  oval 1.55x0.3 smd: 1(-2.8,2.275) 2(-2.8,1.625) 3(-2.8,0.975) 4(-2.8,0.325) 5(-2.8,-0.325) 6(-2.8,-0.975) 7(-2.8,-1.625) 8(-2.8,-2.275) 9(2.8,-2.275) 10(2.8,-1.625) 11(2.8,-0.975) 12(2.8,-0.325) 13(2.8,0.325) 14(2.8,0.975) 15(2.8,1.625) 16(2.8,2.275)
  silkscreen extent -2.92,-2.55 2.25,3.1, body extent -2.25,-2.55 2.25,2.55, height 1.2

## Part data
BP_A1 BP_A2 BP_A3 BP_A4: "Header, 2-Pin"
D1_A1 D1_A2 D1_A3 D1_A4: "Light Emitting Diode - RED"
FB1_A1 FB1_A2 FB1_A3 FB1_A4: "Ferrite Bead"
J1_A1 J1_A2 J1_A3 J1_A4: library part MCX_FEMALE, "MCX female receptacle RA"
NT1_A1 NT1_A2 NT1_A3 NT1_A4: "Ties two nets together"
P1: "Header, 24-Pin, Dual row"
U1_A1 U1_A2 U1_A3 U1_A4 U2_A1 U2_A2 U2_A3 U2_A4: "IC OPAMP GP 17MHZ RRO 8VSSOP"
U4_A1 U4_A2 U4_A3 U4_A4: "IC VREF SERIES 2.05V/4.096V 5SOT"
U5_A1 U5_A2 U5_A3 U5_A4: library part "LDO 4.2V 200mA", "IC REG LDO 4.2V 0.2A 5SOT"
U10_A1 U10_A2 U10_A3 U10_A4: "IC ADC 16BIT 500KSPS 16-TSSOP"
U15_A1 U15_A2 U15_A3 U15_A4: "IC DGTL POT 8BIT 100K 1CH 8-SOIC"

## Via types
v1: diameter 30, hole 15, Top Layer to Bottom Layer, tented both sides, 124 vias
v2: diameter 40, hole 25, Top Layer to Bottom Layer, 16 vias

## Nets (pads, with @x,y where several pads share a name; then routed paths per layer and width w, separated by ;. In a path a pad name is that pad's centre, name@x,y a point inside that pad or via, vN(x,y) a via of type N, cw(c..) or ccw(c..) an arc to the next point about the centre after c; other vN are vias at no path point)
2.048V_A1: R2_A1.1 R3_A1.1 R4_A1.1 R30_A1.1 U1_A1.3 U2_A1.5 U4_A1.1 | length 2592.9
  Top Layer w10: R2_A1.1@1531.5,3206.5 1575,3206.5 1600,3181.5 1600,2956.5 1645,2911.5 1850,2911.5 v1(1905,2966.5) 1907.8,2969.29 U1_A1.3@1907.8,3074.88 ; R3_A1.1@2108.5,3211.5 2105,3207.99 2105,3166.5 2115,3156.5 v1(2140,3156.5) ; v1@2283.5,3047.99 R30_A1.1@2283.5,3096.5 ; U2_A1.5@2548.39,3233.11 2548.39,3289.88 2560,3301.5 2625,3301.5 2645,3281.5 2645,3036.5 2707.6,2973.9 U4_A1.1@2737.76,2973.9 ; v1(2660,2971.5) U4_A1.1@2735.35,2971.5
  Bottom Layer w10: v1(1905,2966.5) 1960,3021.5 2050,3021.5 2085,3056.5 2085,3121.5 2120,3156.5 v1(2140,3156.5) 2170,3156.5 v1(2280,3046.5) 2355,2971.5 2455,2971.5 ; R4_A1.1@2406.5,3096.5 2406.5,3020 2455,2971.5 ; v1(2660,2971.5) 2455,2971.5
2.048V_A2: R2_A2.1 R3_A2.1 R4_A2.1 R30_A2.1 U1_A2.3 U2_A2.5 U4_A2.1 | length 2592.9
  Top Layer w10: R2_A2.1@1526.5,2591.5 1570,2591.5 1595,2566.5 1595,2341.5 1640,2296.5 1845,2296.5 v1(1900,2351.5) 1902.8,2354.29 U1_A2.3@1902.8,2459.88 ; R3_A2.1@2103.5,2596.5 2100,2592.99 2100,2551.5 2110,2541.5 v1(2135,2541.5) ; v1@2278.5,2432.99 R30_A2.1@2278.5,2481.5 ; U2_A2.5@2543.39,2618.11 2543.39,2674.88 2555,2686.5 2620,2686.5 2640,2666.5 2640,2421.5 2702.6,2358.9 U4_A2.1@2732.76,2358.9 ; v1(2655,2356.5) U4_A2.1@2730.35,2356.5
  Bottom Layer w10: v1(1900,2351.5) 1955,2406.5 2045,2406.5 2080,2441.5 2080,2506.5 2115,2541.5 v1(2135,2541.5) 2165,2541.5 v1(2275,2431.5) 2350,2356.5 2450,2356.5 ; R4_A2.1@2401.5,2481.5 2401.5,2405 2450,2356.5 ; v1(2655,2356.5) 2450,2356.5
2.048V_A3: R2_A3.1 R3_A3.1 R4_A3.1 R30_A3.1 U1_A3.3 U2_A3.5 U4_A3.1 | length 2592.9
  Top Layer w10: R2_A3.1@1526.5,1976.5 1570,1976.5 1595,1951.5 1595,1726.5 1640,1681.5 1845,1681.5 v1(1900,1736.5) 1902.8,1739.29 U1_A3.3@1902.8,1844.88 ; R3_A3.1@2103.5,1981.5 2100,1977.99 2100,1936.5 2110,1926.5 v1(2135,1926.5) ; v1@2278.5,1817.99 R30_A3.1@2278.5,1866.5 ; U2_A3.5@2543.39,2003.11 2543.39,2059.88 2555,2071.5 2620,2071.5 2640,2051.5 2640,1806.5 2702.6,1743.9 U4_A3.1@2732.76,1743.9 ; v1(2655,1741.5) U4_A3.1@2730.35,1741.5
  Bottom Layer w10: v1(1900,1736.5) 1955,1791.5 2045,1791.5 2080,1826.5 2080,1891.5 2115,1926.5 v1(2135,1926.5) 2165,1926.5 v1(2275,1816.5) 2350,1741.5 2450,1741.5 ; R4_A3.1@2401.5,1866.5 2401.5,1790 2450,1741.5 ; v1(2655,1741.5) 2450,1741.5
2.048V_A4: R2_A4.1 R3_A4.1 R4_A4.1 R30_A4.1 U1_A4.3 U2_A4.5 U4_A4.1 | length 2592.9
  Top Layer w10: R2_A4.1@1526.5,1365 1570,1365 1595,1340 1595,1115 1640,1070 1845,1070 v1(1900,1125) 1902.8,1127.8 U1_A4.3@1902.8,1233.39 ; R3_A4.1@2103.5,1370 2100,1366.5 2100,1325 2110,1315 v1(2135,1315) ; v1@2278.5,1206.5 R30_A4.1@2278.5,1255 ; U2_A4.5@2543.39,1391.61 2543.39,1448.39 2555,1460 2620,1460 2640,1440 2640,1195 2702.6,1132.4 U4_A4.1@2732.76,1132.4 ; v1(2655,1130) U4_A4.1@2730.35,1130
  Bottom Layer w10: v1(1900,1125) 1955,1180 2045,1180 2080,1215 2080,1280 2115,1315 v1(2135,1315) 2165,1315 v1(2275,1205) 2350,1130 2450,1130 ; R4_A4.1@2401.5,1255 2401.5,1178.5 2450,1130 ; v1(2655,1130) 2450,1130
3.3VD1: P1.5 U10_A1.16 U15_A1.6 | length 661.6
  Top Layer w20: U15_A1.6@3374.49,3256.5 3319.15,3256.5 3299.8,3237.15 3299.8,3165 ; U10_A1.16@3415,3051.06 3343.94,3051.06 3299.8,3095.2 3299.8,3165 ; P1.5@3595,3185 3455,3185 3435,3165 3299.8,3165
3.3VD2: P1.17 U10_A2.16 U15_A2.6 | length 661.6
  Top Layer w20: U15_A2.6@3369.49,2641.5 3314.15,2641.5 3294.8,2622.15 3294.8,2550 ; U10_A2.16@3410,2436.06 3338.94,2436.06 3294.8,2480.2 3294.8,2550 ; P1.17@3590,2570 3450,2570 3440,2560 3351.72,2560 3341.72,2550 3294.8,2550
3.3VD3: P1.29 U10_A3.16 U15_A3.6 | length 674
  Top Layer w20: U15_A3.6@3369.49,2026.5 3314.15,2026.5 3294.8,2007.15 3294.8,1935 ; U10_A3.16@3410,1821.06 3338.94,1821.06 3294.8,1865.2 3294.8,1935 ; P1.29@3590,1985 3505,1985 3455,1935 3294.8,1935
3.3VD4: P1.41 U10_A4.16 U15_A4.6 | length 678.8
  Top Layer w20: U15_A4.6@3369.49,1415 3314.15,1415 3294.8,1395.66 3294.8,1323.5 ; U10_A4.16@3410,1209.57 3338.94,1209.57 3294.8,1253.7 3294.8,1323.5 ; P1.41@3590,1385 3520,1385 3458.5,1323.5 3294.8,1323.5
4.2V_A1: C1_A1.2 C7_A1.2 C63_A1.1 R5_A1.2 R7_A1.1 U1_A1.8 U2_A1.8 U4_A1.4 U5_A1.5 U10_A1.1 | length 631.5
  Top Layer w10: v1(1405,2956.5) R7_A1.1@1468.5,2956.5 ; U1_A1.8@1856.61,3248.11 v1(1856.61,3299.88) ; v1@2450,3346.69 2450,3254.72 U2_A1.8@2471.61,3233.11 ; v1(2505,2896.5) R5_A1.2@2563.5,2896.5 ; U4_A1.4@2832.24,2899.09 v1@2877.6,2899.09 ; C1_A1.2@3036.5,3051.5 3036.93,3051.06 U10_A1.1@3169.76,3051.06
  Top Layer w20: U5_A1.5@2737.76,3285.75 v1(2763.5,3311.5)
  Bottom Layer w10: C63_A1.1@2763.5,3241.5 v1(2763.5,3311.5) C7_A1.2@2763.5,3361.5
  other v1: 2880,2896.5 3095,3050 2449.61,3356.5
4.2V_A2: C1_A2.2 C7_A2.2 C63_A2.1 R5_A2.2 R7_A2.1 U1_A2.8 U2_A2.8 U4_A2.4 U5_A2.5 U10_A2.1 | length 649
  Top Layer w10: v1(1400,2341.5) R7_A2.1@1463.5,2341.5 ; U1_A2.8@1851.61,2633.11 v1(1851.61,2684.88) ; v1@2455.61,2739.8 2445,2729.19 2445,2634.72 U2_A2.8@2466.61,2613.11 ; v1(2500,2281.5) R5_A2.2@2558.5,2281.5 ; U4_A2.4@2827.24,2284.09 v1@2872.6,2284.09 ; C1_A2.2@3031.5,2436.5 3031.93,2436.06 U10_A2.1@3164.76,2436.06
  Top Layer w20: U5_A2.5@2732.76,2670.75 v1(2758.5,2696.5)
  Bottom Layer w10: C63_A2.1@2758.5,2626.5 v1(2758.5,2696.5) C7_A2.2@2758.5,2746.5
  other v1: 2875,2281.5 3085,2436.06 2444.61,2741.5
4.2V_A3: C1_A3.2 C7_A3.2 C63_A3.1 R5_A3.2 R7_A3.1 U1_A3.8 U2_A3.8 U4_A3.4 U5_A3.5 U10_A3.1 | length 667.9
  Top Layer w10: v1(1400,1726.5) R7_A3.1@1463.5,1726.5 ; U1_A3.8@1851.61,2018.11 v1(1851.61,2069.88) ; v1(2430,2140) 2441.61,2140 2450,2131.61 2450,2019.72 U2_A3.8@2466.61,2003.11 ; v1(2500,1666.5) R5_A3.2@2558.5,1666.5 ; U4_A3.4@2827.24,1669.09 v1@2872.6,1669.09 ; C1_A3.2@3031.5,1821.5 3031.93,1821.06 U10_A3.1@3164.76,1821.06
  Top Layer w20: U5_A3.5@2732.76,2055.75 v1(2758.5,2081.5)
  Bottom Layer w10: C63_A3.1@2758.5,2011.5 v1(2758.5,2081.5) C7_A3.2@2758.5,2131.5
  other v1: 2875,1666.5 3085,1821.06
4.2V_A4: C1_A4.2 C7_A4.2 C63_A4.1 R5_A4.2 R7_A4.1 U1_A4.8 U2_A4.8 U4_A4.4 U5_A4.5 U10_A4.1 | length 648.7
  Top Layer w10: v1(1400,1115) R7_A4.1@1463.5,1115 ; U1_A4.8@1851.61,1406.61 v1(1851.61,1458.39) ; v1(2446.16,1522.8) 2446.16,1412.07 U2_A4.8@2466.61,1391.61 ; v1(2500,1055) R5_A4.2@2558.5,1055 ; U4_A4.4@2827.24,1057.6 v1@2872.6,1057.6 ; C1_A4.2@3031.5,1210 3031.93,1209.57 U10_A4.1@3164.76,1209.57
  Top Layer w20: U5_A4.5@2732.76,1444.25 v1(2758.5,1470)
  Bottom Layer w10: C63_A4.1@2758.5,1400 v1(2758.5,1470) C7_A4.2@2758.5,1520
  other v1: 2875,1055 3085,1209.57
4.096V_A1: C5_A1.2 C62_A1.1 U4_A1.5 U10_A1.7 | length 840.7
  Top Layer w10: U4_A1.5@2832.24,2973.9 2842.6,2973.9 2915,2901.5 2915,2886.5 2940,2861.5 3001.5,2861.5 C5_A1.2@3036.5,2896.5 3037.52,2897.52 U10_A1.7@3169.76,2897.52 ; C62_A1.1@2973.5,3206.5 2973.5,3152.99 3000,3126.5 3085,3126.5 v1(3120,3091.5)
  Bottom Layer w10: v1(3095,2896.5) 3122.5,2924 3122.5,3089 v1(3120,3091.5)
4.096V_A2: C5_A2.2 C62_A2.1 U4_A2.5 U10_A2.7 | length 840.7
  Top Layer w10: U4_A2.5@2827.24,2358.9 2837.6,2358.9 2910,2286.5 2910,2271.5 2935,2246.5 2996.5,2246.5 C5_A2.2@3031.5,2281.5 3032.52,2282.52 U10_A2.7@3164.76,2282.52 ; C62_A2.1@2968.5,2591.5 2968.5,2537.99 2995,2511.5 3080,2511.5 v1(3115,2476.5)
  Bottom Layer w10: v1(3090,2281.5) 3117.5,2309 3117.5,2474 v1(3115,2476.5)
4.096V_A3: C5_A3.2 C62_A3.1 U4_A3.5 U10_A3.7 | length 840.7
  Top Layer w10: U4_A3.5@2827.24,1743.9 2837.6,1743.9 2910,1671.5 2910,1656.5 2935,1631.5 2996.5,1631.5 C5_A3.2@3031.5,1666.5 3032.52,1667.52 U10_A3.7@3164.76,1667.52 ; C62_A3.1@2968.5,1976.5 2968.5,1922.99 2995,1896.5 3080,1896.5 v1(3115,1861.5)
  Bottom Layer w10: v1(3090,1666.5) 3117.5,1694 3117.5,1859 v1(3115,1861.5)
4.096V_A4: C5_A4.2 C62_A4.1 U4_A4.5 U10_A4.7 | length 840.7
  Top Layer w10: U4_A4.5@2827.24,1132.4 2837.6,1132.4 2910,1060 2910,1045 2935,1020 2996.5,1020 C5_A4.2@3031.5,1055 3032.52,1056.02 U10_A4.7@3164.76,1056.02 ; C62_A4.1@2968.5,1365 2968.5,1311.5 2995,1285 3080,1285 v1(3115,1250)
  Bottom Layer w10: v1(3090,1055) 3117.5,1082.5 3117.5,1247.5 v1(3115,1250)
5V_A1: C6_A1.2 C50_A1.1 C61_A1.1 FB1_A1.2 R8_A1.2 U5_A1.1 | length 954.3
  Top Layer w20: U5_A1.1@2832.24,3279.09 2885,3226.34 2885,3005 2953.5,2936.5 v1(3025,2936.5)
  Bottom Layer w20: R8_A1.2@3026.5,2876.5 C61_A1.1@3026.5,2996.5 C6_A1.2@3026.5,3121.5 C50_A1.1@3026.5,3246.5 FB1_A1.2@3026.5,3366.5
5V_A2: C6_A2.2 C50_A2.1 C61_A2.1 FB1_A2.2 R8_A2.2 U5_A2.1 | length 957.3
  Top Layer w20: U5_A2.1@2827.24,2664.09 2880,2611.34 2880,2385 2943.5,2321.5 v1(3020,2321.5)
  Bottom Layer w20: R8_A2.2@3021.5,2261.5 C61_A2.1@3021.5,2381.5 C6_A2.2@3021.5,2506.5 C50_A2.1@3021.5,2631.5 FB1_A2.2@3021.5,2751.5
5V_A3: C6_A3.2 C50_A3.1 C61_A3.1 FB1_A3.2 R8_A3.2 U5_A3.1 | length 957.3
  Top Layer w20: U5_A3.1@2827.24,2049.09 2880,1996.34 2880,1770 2943.5,1706.5 v1(3020,1706.5)
  Bottom Layer w20: R8_A3.2@3021.5,1646.5 C61_A3.1@3021.5,1766.5 C6_A3.2@3021.5,1891.5 C50_A3.1@3021.5,2016.5 FB1_A3.2@3021.5,2136.5
5V_A4: C6_A4.2 C50_A4.1 C61_A4.1 FB1_A4.2 R8_A4.2 U5_A4.1 | length 956.4
  Top Layer w20: U5_A4.1@2827.24,1437.6 2880,1384.84 2880,1160 2945,1095 v1(3020,1095)
  Bottom Layer w20: R8_A4.2@3021.5,1035 C61_A4.1@3021.5,1155 C6_A4.2@3021.5,1280 C50_A4.1@3021.5,1405 FB1_A4.2@3021.5,1525
5VD1: FB1_A1.1 P1.2 | length 798.1
  Bottom Layer w20: FB1_A1.1@2963.5,3366.5 2963.5,3403.5 2990,3430 3650,3430 P1.2@3695,3385
5VD2: FB1_A2.1 P1.14 | length 797.6
  Bottom Layer w20: FB1_A2.1@2959.22,2750.78 2959.22,2774.22 2980,2795 3075,2795 3129.53,2740.47 3660.47,2740.47 P1.14@3690,2770
5VD3: FB1_A3.1 P1.26 | length 814.7
  Bottom Layer w20: FB1_A3.1@2958.5,2136.5 2958.5,2173.5 2985,2200 3515,2200 3580,2135 3670,2135 3690,2155
5VD4: FB1_A4.1 P1.38 | length 812
  Bottom Layer w20: FB1_A4.1@2958.5,1525 2958.5,1562.01 2966.5,1570 3490,1570 3525,1535 3645,1535 P1.38@3695,1585
+INA2_A1: C28_A1.2 R30_A1.2 U2_A1.3 | length 667.6
  Top Layer w10: C28_A1.2@2171.5,2971.5 2275,2971.5 2346.5,3042.99 R30_A1.2@2346.5,3096.5 ; 2221.5,2971.5 2261.5,2931.5 2460,2931.5 2522.8,2994.29 U2_A1.3@2522.8,3059.88
+INA2_A2: C28_A2.2 R30_A2.2 U2_A2.3 | length 667.6
  Top Layer w10: C28_A2.2@2166.5,2356.5 2270,2356.5 2341.5,2427.99 R30_A2.2@2341.5,2481.5 ; 2216.5,2356.5 2256.5,2316.5 2455,2316.5 2517.8,2379.29 U2_A2.3@2517.8,2444.88
+INA2_A3: C28_A3.2 R30_A3.2 U2_A3.3 | length 667.6
  Top Layer w10: C28_A3.2@2166.5,1741.5 2270,1741.5 2341.5,1812.99 R30_A3.2@2341.5,1866.5 ; 2216.5,1741.5 2256.5,1701.5 2455,1701.5 2517.8,1764.29 U2_A3.3@2517.8,1829.88
+INA2_A4: C28_A4.2 R30_A4.2 U2_A4.3 | length 667.6
  Top Layer w10: C28_A4.2@2166.5,1130 2270,1130 2341.5,1201.5 R30_A4.2@2341.5,1255 ; 2216.5,1130 2256.5,1090 2455,1090 2517.8,1152.8 U2_A4.3@2517.8,1218.39
+INB1_A1: C42_A1.2 R33_A1.2 U1_A1.5 | length 274.2
  Top Layer w10: U1_A1.5@1933.39,3248.11 1933.39,3274.88 1955,3296.5 v1(1970,3296.5)
  Bottom Layer w10: v1(1970,3296.5) 1980,3286.5 1980,3227.99 C42_A1.2@1973.5,3221.5 R33_A1.2@1973.5,3101.5
+INB1_A2: C42_A2.2 R33_A2.2 U1_A2.5 | length 274.2
  Top Layer w10: U1_A2.5@1928.39,2633.11 1928.39,2659.88 1950,2681.5 v1(1965,2681.5)
  Bottom Layer w10: v1(1965,2681.5) 1975,2671.5 1975,2612.99 C42_A2.2@1968.5,2606.5 R33_A2.2@1968.5,2486.5
+INB1_A3: C42_A3.2 R33_A3.2 U1_A3.5 | length 274.2
  Top Layer w10: U1_A3.5@1928.39,2018.11 1928.39,2044.88 1950,2066.5 v1(1965,2066.5)
  Bottom Layer w10: v1(1965,2066.5) 1975,2056.5 1975,1997.99 C42_A3.2@1968.5,1991.5 R33_A3.2@1968.5,1871.5
+INB1_A4: C42_A4.2 R33_A4.2 U1_A4.5 | length 274.2
  Top Layer w10: U1_A4.5@1928.39,1406.61 1928.39,1433.39 1950,1455 v1(1965,1455)
  Bottom Layer w10: v1(1965,1455) 1975,1445 1975,1386.5 C42_A4.2@1968.5,1380 R33_A4.2@1968.5,1260